# EAGLE board v2 (EAGLE 9.6.2)
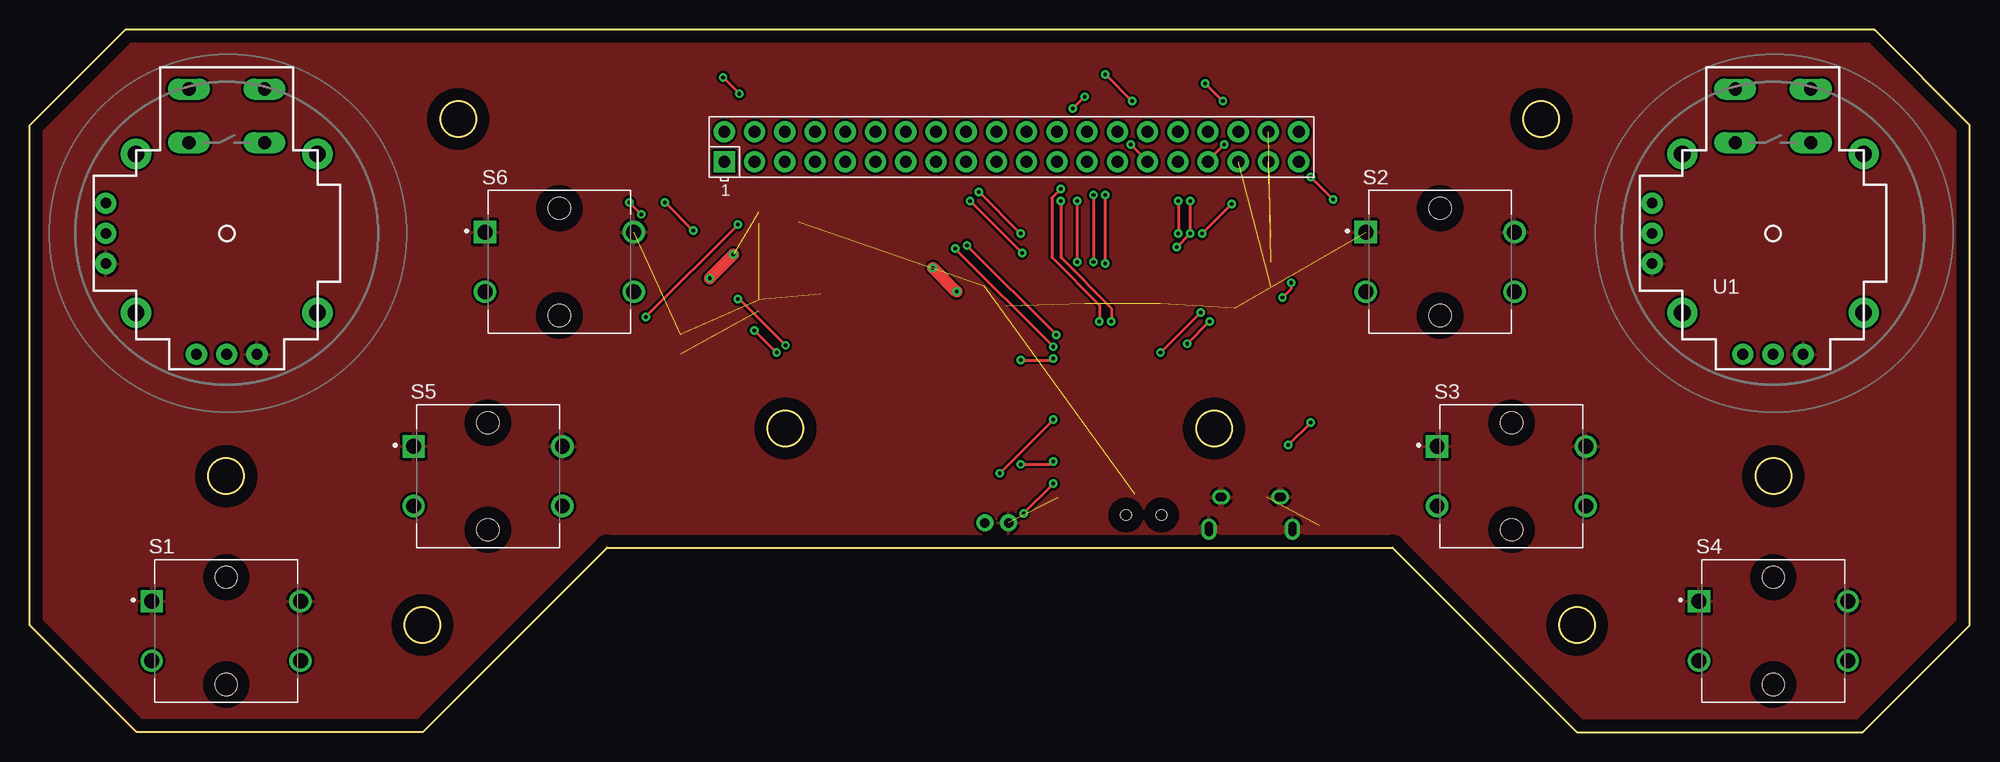
[diagram p0: board, top side]
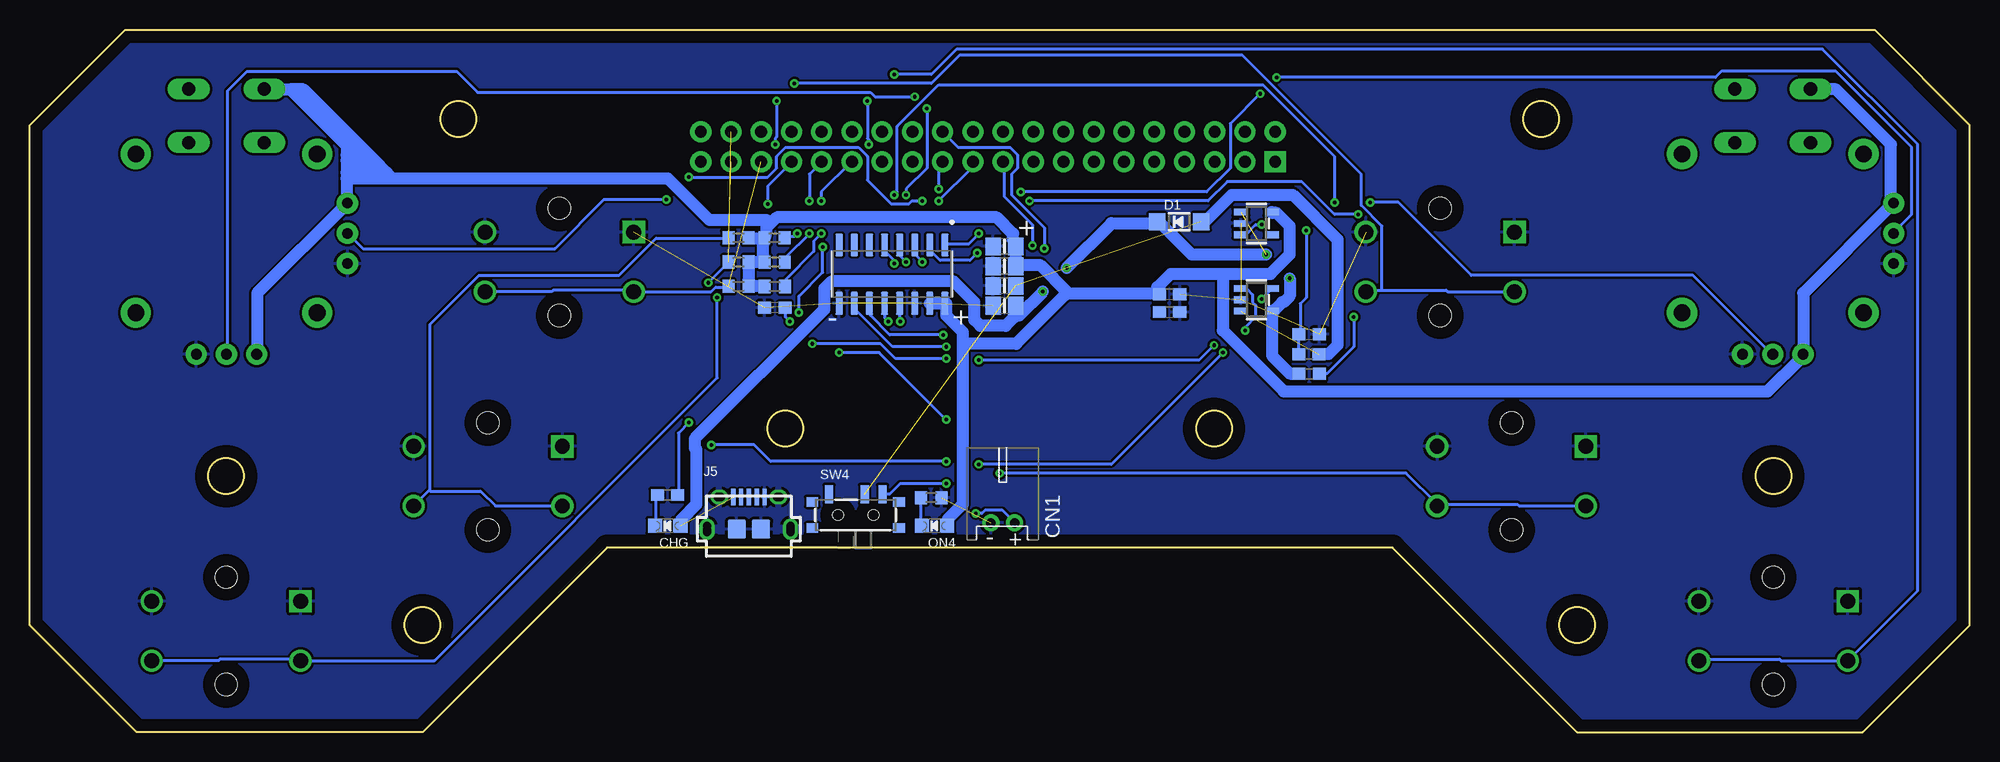
[diagram p1: board, bottom side, seen from below]

Size 163 x 59 mm. Coordinates in mm from the lower left corner, seen from the top.
Outline: 48.5,15.5 33,0 9,0 0,9 0,51 8,59 155,59 163,51 163,9 154,0 130,0 114.5,15.5 48.5,15.5
Outline: circle at 130,9 radius 1.5
Outline: circle at 33,9 radius 1.5
Outline: circle at 16.5,21.5 radius 1.5
Outline: circle at 146.5,21.5 radius 1.5
Outline: circle at 63.5,25.5 radius 1.5
Outline: circle at 99.5,25.5 radius 1.5
Outline: circle at 127,51.5 radius 1.5
Outline: circle at 36,51.5 radius 1.5
Copper layers (1*16): Top 0.035mm / dielectric 1.5mm / Bottom 0.035mm
Design rules "default *": minimum track width 0.2mm, minimum drill 0.3mm, track to track 0.2mm, track to pad 0.2mm, pad to pad 0.2mm, via to via 0.2mm, smd to smd 0.2mm, copper to edge 40mil, drill to drill 6mil, minimum pad ring 10mil, minimum via ring 8mil, stop-mask expansion 4mil, vias tented up to drill 0mil, thermal gap 10mil
Net classes: 0 default: width 0.25 mm, drill 0.3 mm, clearance 0.2 mm; 1 USB: drill 0.3 mm, clearance 0.2 mm; 3 usbvcc: drill 0.3 mm, clearance 0.2 mm; 4 5V: width 1 mm, drill 0.3 mm, clearance 0.4 mm

## Footprints (pad centres in the part's own frame; a part is rotated, then mirrored left to right if it is on the bottom)
0805-NO = smd 1.3 x 1.5: 1 -0.95,0; 2 0.95,0
0603-NO = smd 1.1 x 1: 1 -0.85,0; 2 0.85,0
CHIPLED_0805_NOOUTLINE = smd 1.2 x 1.2: A 0,-1.05; C 0,1.05
JST-PH-2-THM-RA = drill 0.8 pad 1.422: 1 1,0; 2 -1,0
SOD-123 = smd 1.4 x 1.4: A 1.85,0; C -1.85,0
MICRO-SMD = smd 0.406 x 1.346: D+ 0,2.057; D- -0.66,2.057; GND 1.321,2.057; ID 0.66,2.057; VBUS -1.321,2.057 | drill 0.7: S1 -2.489,2.057; S1@1 -2.616,2.057; S1@2 -2.362,2.057; S2 2.464,2.057; S2@1 2.362,2.057; S2@2 2.616,2.057 | drill 0.7 pad 1.27: S3 -3.505,-0.66; S3@1 -3.505,-0.381; S3@2 -3.505,-0.889; S4 3.505,-0.635; S4@1 3.505,-0.381; S4@2 3.505,-0.889 | smd 1.524 x 1.524: S5 -1.016,-0.635; S6 1.016,-0.635
R0603 = smd 1 x 1.1: 1 -0.85,0; 2 0.85,0
SW_B3F-4050 = drill 1.25 square: 1 -6.25,2.5 | drill 1.25: 2 6.25,2.5; 3 -6.25,-2.5; 4 6.25,-2.5 | hole 1.85: 0,4.5; 0,-4.5
SPDT_SMT_SSSS811101 = smd 0.7 x 1.5: A -2.25,1.75; B 0.75,1.75; C 2.25,1.75 | smd 1 x 0.8: SUP1 -3.65,1.1; SUP2 -3.65,-1.1; SUP3 3.65,1.1; SUP4 3.65,-1.1 | hole 0.9: -1.5,0; 1.5,0
JOYSTICK = drill 1.1 pad 1.778 long: B1A -3.175,12.12; B1B 3.175,12.12; B2A -3.175,7.62; B2B 3.175,7.62 | drill 0.889 pad 1.778: H1 -2.54,-10.16; H2 0,-10.16; H3 2.54,-10.16; V1 -10.16,2.54; V2 -10.16,0; V3 -10.16,-2.54 | drill 1.397 pad 2.54: MOUNT1 -7.62,6.668; MOUNT2 -7.62,-6.668; MOUNT3 7.62,-6.668; MOUNT4 7.62,6.668
SOIC127P600X175-16N = smd 1.9 x 0.6: 1 -2.455,4.445; 2 -2.455,3.175; 3 -2.455,1.905; 4 -2.455,0.635; 5 -2.455,-0.635; 6 -2.455,-1.905; 7 -2.455,-3.175; 8 -2.455,-4.445; 9 2.455,-4.445; 10 2.455,-3.175; 11 2.455,-1.905; 12 2.455,-0.635; 13 2.455,0.635; 14 2.455,1.905; 15 2.455,3.175; 16 2.455,4.445
SOT23-5 = smd 0.55 x 1.2: 1 -0.95,-1.3; 2 0,-1.3; 3 0.95,-1.3; 4 0.95,1.3; 5 -0.95,1.3
RASPBERRYPI_BASTELSTUBE_V13_RASPI_BOARD_B+_FULL = drill 1 pad 1.778 square: 1 2.02,1.1 | drill 1 pad 1.778: 2 2.02,3.64; 3 4.56,1.1; 4 4.56,3.64; 5 7.1,1.1; 6 7.1,3.64; 7 9.64,1.1; 8 9.64,3.64; 9 12.18,1.1; 10 12.18,3.64; 11 14.72,1.1; 12 14.72,3.64; 13 17.26,1.1; 14 17.26,3.64; 15 19.8,1.1; 16 19.8,3.64; 17 22.34,1.1; 18 22.34,3.64; 19 24.88,1.1; 20 24.88,3.64; 21 27.42,1.1; 22 27.42,3.64; 23 29.96,1.1; 24 29.96,3.64; 25 32.5,1.1; 26 32.5,3.64; 27 35.04,1.1; 28 35.04,3.64; 29 37.58,1.1; 30 37.58,3.64; 31 40.12,1.1; 32 40.12,3.64; 33 42.66,1.1; 34 42.66,3.64; 35 45.2,1.1; 36 45.2,3.64; 37 47.74,1.1; 38 47.74,3.64; 39 50.28,1.1; 40 50.28,3.64

## Placement (x,y rotation side)
C5  10µF  [0805-NO]  81.11,35.82 180 bottom
C7  1uF  [0603-NO]  67.23,36.8 0 bottom
C8  10µF  [0805-NO]  81.11,39.14 180 bottom
C9  10µF  [0805-NO]  81.11,37.48 180 bottom
C13  10uF  [0805-NO]  81.11,40.8 180 bottom
C14  1uF  [0603-NO]  67.23,35.29 0 bottom
CHG  ORANGE  [CHIPLED_0805_NOOUTLINE]  109.4,17.33 90 bottom
CN1  [JST-PH-2-THM-RA]  81.25,17.58 0 bottom
D1  MBR120  [SOD-123]  66.43,42.87 0 bottom
J5  U-F-M5DD-Y-L  [MICRO-SMD]  102.58,17.69 0 bottom
ON4  GREEN  [CHIPLED_0805_NOOUTLINE]  86.99,17.33 90 bottom
R1  10k  [R0603]  100.41,39.48 180 bottom
R2  10k  [R0603]  100.43,41.53 180 bottom
R3  1K  [0603-NO]  109.41,19.92 0 bottom
R4  100k  [0603-NO]  55.52,31.74 180 bottom
R5  1k  [R0603]  87.25,19.7 0 bottom
R6  10k  [R0603]  100.4,37.43 180 bottom
R7  100K  [0603-NO]  55.5,33.42 0 bottom
R8  10K\  [0603-NO]  100.4,35.65 180 bottom
R9  100k  [0603-NO]  55.5,30.1 0 bottom
R10  10k  [R0603]  103.45,37.44 0 bottom
R11  10k  [R0603]  103.45,41.53 0 bottom
R12  10k  [R0603]  103.45,39.49 0 bottom
S1  B3F-4050  [SW_B3F-4050]  16.5,8.5 0 top
S2  B3F-4050  [SW_B3F-4050]  118.5,39.5 0 top
S3  B3F-4050  [SW_B3F-4050]  124.5,21.5 0 top
S4  B3F-4050  [SW_B3F-4050]  146.5,8.5 0 top
S5  B3F-4050  [SW_B3F-4050]  38.5,21.5 0 top
S6  B3F-4050  [SW_B3F-4050]  44.5,39.5 0 top
SW4  [SPDT_SMT_SSSS811101]  93.6,18.24 0 bottom
U1  JOYSTICKPTH  [JOYSTICK]  146.47,41.9 0 top
U2  MCP3008-I/SL  [SOIC127P600X175-16N]  90.55,38.47 270 bottom
U3  JOYSTICKPTH  [JOYSTICK]  16.55,41.9 0 top
U4  SPX3819-3.3  [SOT23-5]  59.94,42.73 270 bottom
U5  MCP73831T-2ACI/OT  [SOT23-5]  59.94,36.32 270 bottom
U$1  RPI-ZERO  [RASPBERRYPI_BASTELSTUBE_V13_RASPI_BOARD_B+_FULL]  56.34,46.8 0 top

## Library data of the parts
C5 C7-C9 C13 C14 CHG D1 ON4 R3 R4 R7-R9 SW4 U4 U5 = microbuilder
CN1 R1 R2 R5 R6 R10-R12 U1 U3 = adafruit
J5 = Connector_NOA
S1-S6 = B3F-4050; DESCRIPTION: Tactile Switch SPST-NO Top Actuated Through Hole; DIGI-KEY_PART_NUMBER: SW413-ND; MF: Omron Electronics; MP: B3F-4050; PACKAGE: None; PURCHASE-URL: https://pricing.snapeda.com/search/part/B3F-4050/?ref=eda
U2 = MCP3008-I_SL; AVAILABILITY: Good; DESCRIPTION: 10 Bit Analog to Digital Converter 4, 8 Input 1 SAR 16-SOIC; MF: Microchip; MP: MCP3008-I/SL; PACKAGE: SOIC-16 Microchip; PRICE: None; PURCHASE-URL: https://pricing.snapeda.com/search/part/MCP3008-I/SL/?ref=eda
U$1 = RPI-Zero

## Nets
3.3V [5V]: C7.1 C8.1 C13.1 ON4.A R1.2 R2.2 R6.2 R10.2 R11.2 R12.2 U1.B1A U1.H1 U1.V1 U2.15 U2.16 U3.B1A U3.H1 U3.V1 U4.5
AREF: C14.1
B_1: U3.B2A
B_2: U1.B2A
BATTERY_SENSE: R4.2 R7.1 U2.5
BTN_A: R6.1 S1.3 S1.4 U$1.29
BTN_B: R1.1 S5.3 S5.4 U$1.31
BTN_C: R2.1 S6.3 S6.4 U$1.33
BTN_D: R10.1 S2.3 S2.4 U$1.35
BTN_E: R11.1 S3.3 S3.4 U$1.37
BTN_F: R12.1 S4.3 S4.4 U$1.38
CE0: U2.10 U$1.24
D_N [USB]: J5.D-
D_P [USB]: J5.D+
EN: R9.2 U4.3
GND: C5.2 C7.2 C8.2 C9.2 C13.2 C14.2 CN1.2 J5.GND J5.S1 J5.S1@1 J5.S1@2 J5.S2 J5.S2@1 J5.S2@2 J5.S3 J5.S3@1 J5.S3@2 J5.S4 J5.S4@1 J5.S4@2 J5.S5 J5.S6 R5.2 R7.2 R8.2 S1.1 S1.2 S2.1 S2.2 S3.1 S3.2 S4.1 S4.2 S5.1 S5.2 S6.1 S6.2 U1.H3 U1.V3 U2.9 U2.14 U3.H3 U3.V3 U4.2 U5.2
H1: U2.2 U3.H2
H2: U1.H2 U2.4
MISO: U2.12 U$1.21
MOSI: U2.11 U$1.19
N$1: CHG.C R3.1
N$2: CN1.1 SW4.C
N$3: R3.2 U5.1
N$4: R8.1 U5.5
N$7: U$1.40
N$9: ON4.C R5.1
SCLK: U2.13 U$1.23
V1: U2.1 U3.V2
V2: U1.V2 U2.3
VBAT [5V]: C9.1 D1.A R4.1 SW4.B U5.3
VBUS [5V]: C5.1 CHG.A D1.C J5.VBUS R9.1 U4.1 U5.4

## Tracks (layer width: path | path; a pad name or v marks a point on that pad's centre or on a via)
3.3V
  Bottom 1: 136.38,49.25 136.38,48.5 | 136.38,48.5 136.38,48 | 136.38,48 136.38,47 | 136.38,47 136.38,46.5 | 136.38,46.5 136.38,44.5 U1.V1 143.88,36.88 143.88,31.75 U1.H1 | 141.12,54 136.38,49.25 | 141.12,54 143.25,54 U1.B1A | U3.B1A 13.38,54 11.25,54 6.62,49.38 6.62,44.88 U3.V1 6.5,44.38 14,36.88 U3.H1 14.25,31.38 17,28.62 57.62,28.62 62.75,33.75 62.75,38.5 | 84.62,32.62 84.62,33.62 86,35 86,36 U2.16 86.5,36 87.38,36 U2.15 | 84.62,32.62 84.62,19.12 85.88,17.88 85.88,17.38 ON4.A | 102.5,37.5 101.25,37.5 R6.2 | 102.5,37.5 R10.2 | R2.2 101.38,41.5 102.5,41.5 R11.2 | R2.2 101.38,41 101.38,40 R1.2 101.38,39.5 102.5,39.5 R12.2 102.62,39 102.62,38 102.5,37.5 | 75.75,36.88 68.12,36.88 | 75.75,36.88 78.12,39.25 80.12,39.25 C8.1 80.12,39.75 80.12,40.75 C13.1 80.38,41.25 80.38,41.88 81.75,43.25 100.25,43.25 100.81,42.69 | 68.12,36.88 C7.1 | 62.75,38.5 67.12,38.5 68.25,37.38 68.12,36.88 | 62.75,38.5 58.75,38.5 57.12,40.12 57.12,42.5 58.25,43.62 58.62,43.62 U4.5 | 100.81,42.69 101.12,42.38 101.12,42 R2.2 | 84.62,32.62 80.12,32.62 76.12,36.62 75.75,36.88 | 132.5,46.5 109.38,46.5 105.88,43 101.12,43 100.81,42.69 | 132.5,46.5 136.38,46.5 | 132.5,46.5 133,47 | 133,47 136.38,47 | 133,47 134,48 | 136.38,48 134,48 | 134,48 134.5,48.5 | 134.5,48.5 136.38,48.5 | 134.5,48.5 135.25,49.25 | 136.38,49.25 135.25,49.25 | 135.25,49.25 140,54 141.12,54
BATTERY_SENSE  (via drill 0.3)
  Top 0.25: v53.38,44.5 v55.75,42.12 | v90.38,39.38 v90.38,45.12
  Bottom 0.25: R4.2 56.38,33.38 R7.1 56.25,33.5 56.25,36 55.75,36.5 v55.75,42.12 | v53.38,44.5 53.38,48.38 59.38,54.38 86.62,54.38 90.12,50.88 90.12,45.38 v90.38,45.12 | v90.38,39.38 90.38,39.62 91.12,40.38 91.12,40.88 U2.5
BTN_A  (via drill 0.3)
  Top 0.25: v96.5,44.62 v96.5,41.88 | v92.5,49.38 93.88,48 U$1.29 | v90.38,55.25 v92.62,53
  Bottom 0.25: v96.5,41.88 97.12,41.25 97.12,40.38 99.5,38 99.5,37.5 R6.1 | v96.5,44.62 96.5,45.38 94,47.88 U$1.29 | S1.4 22.62,6.12 16,6.12 15.88,6 S1.3 4.38,11.88 4.38,49.38 12.38,57.38 85.12,57.38 87.25,55.25 v90.38,55.25 | v92.5,49.38 92.5,49.75 92.62,49.88 v92.62,53
BTN_B  (via drill 0.3)
  Top 0.25: v97.5,44.62 v97.5,41.88 v96.38,40.75 | v95,31.88 v98.38,35.25 | v81.5,21.75 v86,26.25
  Bottom 0.25: v97.5,41.88 99.5,39.88 99.5,39.5 R1.1 | v97.5,44.62 97.5,46.88 96.5,47.88 U$1.31 | S5.3 37.88,19 38,19.12 44.62,19.12 S5.4 44.75,19.12 47.38,21.75 v81.5,21.75 | v96.38,40.75 96.38,38.62 98.38,36.62 v98.38,35.25 | v95,31.88 91.62,31.88 v86,26.25
BTN_C  (via drill 0.3)
  Top 0.25: v101,44.38 v98.5,41.88 | v100.38,49.38 99,48 U$1.33 | v98.75,54.5 v100.25,53
  Bottom 0.25: v98.5,41.88 98.75,41.62 99.5,41.62 R2.1 | v101,44.38 101,45.88 99,47.88 U$1.33 | S6.3 43.88,37 44,37.12 49.38,37.12 | 49.38,37.12 50.62,37.12 S6.4 | v100.38,49.38 100.38,49.88 100.25,50 v100.25,53 | v98.75,54.5 87.25,54.5 84.88,56.88 61.12,56.88 51.12,46.88 51.12,44.25 49.38,42.5 49.38,37.12
BTN_D  (1 unrouted)
  Bottom 0.25: R10.1 104.38,37.38 105.38,37.38 105.75,37 S2.3 112.38,37.12 119,37.12 119.12,37 S2.4
BTN_E  (1 unrouted)
  Bottom 0.25: S3.4 129.44,20.31 | 129.44,20.31 129.38,20.38 129.38,34.25 125.25,38.38 113.5,38.38 110.38,41.5 104.38,41.5 R11.1 | S3.3 123.88,19 125.12,20.25 129.38,20.25 129.44,20.31
BTN_F  (via drill 0.3)  (1 unrouted)
  Top 0.25: v106,37.75 106,37.25 v105.25,36.5
  Bottom 0.25: v106,37.75 104.38,39.38 R12.1 | v105.25,36.5 105.25,29.75 129,6 S4.3 140.38,6.12 147,6.12 147.12,6 S4.4
CE0  (via drill 0.3)
  Top 0.25: v77.75,40.62 v86,32.38
  Bottom 0.25: v86,32.38 90.5,32.38 93.62,35.5 93.62,36 U2.10 | v77.75,40.62 77.75,42.38 80.5,45.12 80.5,46.88 80,47.38 80,48.5 80.62,49.12 85,49.12 86.25,50.38 U$1.24
EN  (via drill 0.3)
  Top 0.25: v59.5,42.62 v51.75,34.88
  Bottom 0.25: v51.75,34.88 51.75,32.38 54,30.12 54.62,30.12 R9.2 | v59.5,42.62 60,42.62 60.75,41.88 61.12,41.88 U4.3
GND  (9 unrouted)
  pour Bottom: -4.5,52.5 4.5,61.5 166.5,61.5 167.5,60.5 167.5,-6.5 163.5,-10.5 79.5,-10.5 10.5,-10.5 -5.5,5.5 -5.5,51.5
  pour Top: -11.5,49.5 5.5,66.5 113.5,66.5 154.5,66.5 173.5,47.5 173.5,13.5 142.5,-17.5 6.5,-17.5 -12.5,1.5 -12.5,48.5
H1  (via drill 0.3)
  Top 0.25: v79,44.62 v83.38,40.25 | v50.38,44.5 v51.38,43.5
  Bottom 0.25: U2.2 87.38,40.5 86.5,39.62 84,39.62 v83.38,40.25 | v79,44.62 64,44.62 62.38,46.25 56.12,46.25 53.38,43.5 v51.38,43.5 | v50.38,44.5 48,44.5 41.88,38.38 23.25,38.38 16.62,31.75 U3.H2
H2  (via drill 0.3)
  Top 0.25: v89.38,45.12 v89.38,39.5 | v88.62,53.38 v87.62,52.38
  Bottom 0.25: v89.38,39.5 89.88,40 89.88,40.88 U2.4 | v89.38,45.12 89.38,45.62 87.62,47.38 v87.62,52.38 | v88.62,53.38 92,53.38 92.38,53.75 125.38,53.75 127.12,55.5 144.75,55.5 146.38,53.88 146.38,31.75 U1.H2
MISO  (via drill 0.3)
  Top 0.25: v90.88,34.5 90.88,35.62 86.62,39.88 v86.62,44.62
  Bottom 0.25: v90.88,34.5 91.12,34.75 91.12,36 U2.12 | v86.62,44.62 83.88,47.38 83.88,47.88 U$1.21
MOSI  (via drill 0.3)
  Top 0.25: v78.75,40.88 v86.25,33.38
  Bottom 0.25: v86.25,33.38 90.75,33.38 92.38,35 92.38,36 U2.11 | v78.75,40.88 78.75,42.62 81.12,45 81.12,47.88 U$1.19
N$1
  Bottom 0.25: R3.1 110.38,19.88 110.38,17.38 CHG.C
N$2  (via drill 0.3)
  Top 0.25: v83.5,18.38 v86,20.88
  Bottom 0.25: v86,20.88 89.88,20.88 90.75,20 91.25,20 SW4.C | v83.5,18.38 83,18.38 82.75,18.62 81.25,18.62 80.25,17.62 CN1.1
N$3  (via drill 0.3)
  Top 0.25: v105.75,24.12 v107.62,26 | v86,22.75 85.75,22.5 v83.25,22.5 | v60.88,33.75 v62.75,31.88
  Bottom 0.25: v107.62,26 108.5,25.12 108.5,20 R3.2 | v105.75,24.12 102.12,24.12 100.75,22.75 v86,22.75 | v83.25,22.5 72.12,22.5 v62.75,31.88 | v60.88,33.75 60.88,34 60,34.88 60,35.88 60.25,36.12 60.25,36.75 60.75,37.25 61.12,37.25 U5.1
N$4  (via drill 0.3)
  Top 0.25: v97.25,32.62 v99.12,34.5 | v86,31.38 85.88,31.25 v83.25,31.25 | v63.5,32.5 59.62,36.38 v59.5,36.38
  Bottom 0.25: v99.12,34.5 99.5,34.88 99.5,35.62 R8.1 | v97.25,32.62 91.5,32.62 90.25,31.38 v86,31.38 | v83.25,31.25 64.75,31.25 v63.5,32.5 | v59.5,36.38 58.62,37.25 U5.5
N$9
  Bottom 0.25: R5.1 88.12,19.62 88.12,17.38 ON4.C
SCLK  (via drill 0.3)
  Top 0.25: v89.88,34.5 89.88,35.88 85.88,39.88 85.88,44.88 v86.62,45.62
  Bottom 0.25: v89.88,34.5 89.88,36 U2.13 | v86.62,45.62 86.62,47.62 86.38,47.88 U$1.23
V1  (via drill 0.3)
  Top 0.25: v79.75,45.38 v83.25,41.88 | v58.25,55 v59.62,53.62
  Bottom 0.25: v83.25,41.88 84.12,41 86,41 U2.1 | v79.75,45.38 64.12,45.38 62.12,47.38 62.12,51.12 v59.62,53.62 | v58.25,55 21.38,55 20.88,55.5 11.25,55.5 4.88,49.12 4.88,43.5 6.38,42 U3.V2
V2  (via drill 0.3)
  Top 0.25: v88,44.62 v88,39.5 | v109.5,44.75 v107.62,46.62
  Bottom 0.25: v88,39.5 88.62,40.12 88.62,40.88 U2.3 | v88,44.62 88.88,44.62 89.12,44.38 90.62,44.38 92.62,46.38 92.62,48.38 93.38,49.12 99.5,49.12 100.25,48.38 100.25,47.38 101,46.62 v107.62,46.62 | v109.5,44.75 114.75,44.75 118.88,40.62 135,40.62 136.25,41.88 U1.V2
VBAT  (3 unrouted)
  Bottom 1: R4.1 54.62,31.75 53.88,31.75 53.12,32.5 53.12,41.38 56.88,45.12 62,45.12 64.25,42.88 64.5,42.88 D1.A
VBUS  (via drill 0.3)  (2 unrouted)
  Top 1: v77.88,37 v75.88,39 | v59.12,40.12 v57.12,38.12
  Bottom 1: R9.1 56.38,30.12 57.12,30.12 58.62,31.62 58.62,35.25 U5.4 58.25,35.62 57.75,36.12 57.62,36.12 57.12,36.62 v57.12,38.12 | 80.25,34.88 81,34.12 83.12,34.12 83.62,34.62 83.62,36.12 85.38,37.88 95.62,37.88 96.25,37.25 96.25,35.5 107.12,24.62 107.12,23.88 107,23.75 107,19.12 108.25,17.88 108.25,17.38 CHG.A | 80.25,34.88 80.25,35.75 C5.1 | v75.88,39 72.12,42.75 68.38,42.75 D1.C 67.88,42.62 65.38,40.12 v59.12,40.12 | v77.88,37 79.88,35 80.25,34.88

## Text on the board
bNames: + | + | -
200bmp: C:/Users/CodyS/OneDrive - Queensland University of Technology/Uni Coursework/2021/EGH419 Group 1 Shared Folder/Git Stuff/EGH419/LOGO.bmp